# EAGLE board openevse-ac-filter (EAGLE 8.3.1)
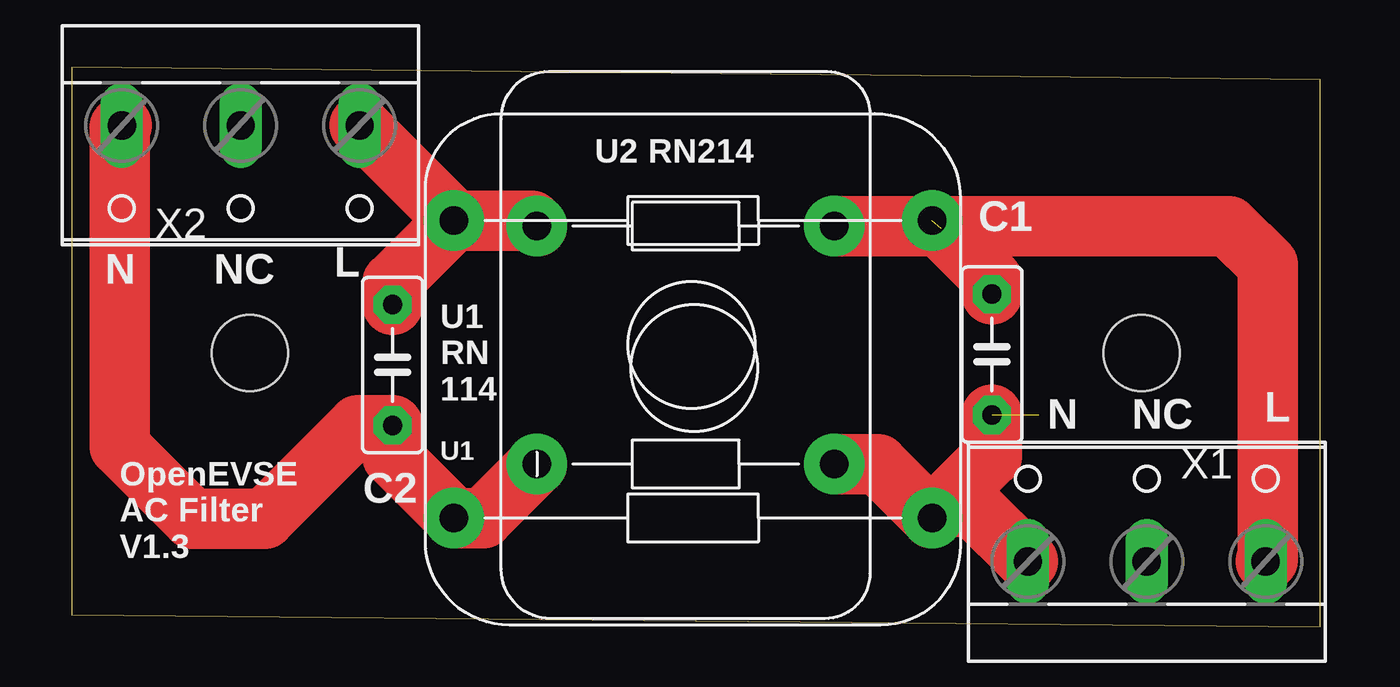
[diagram p0: board, top side]
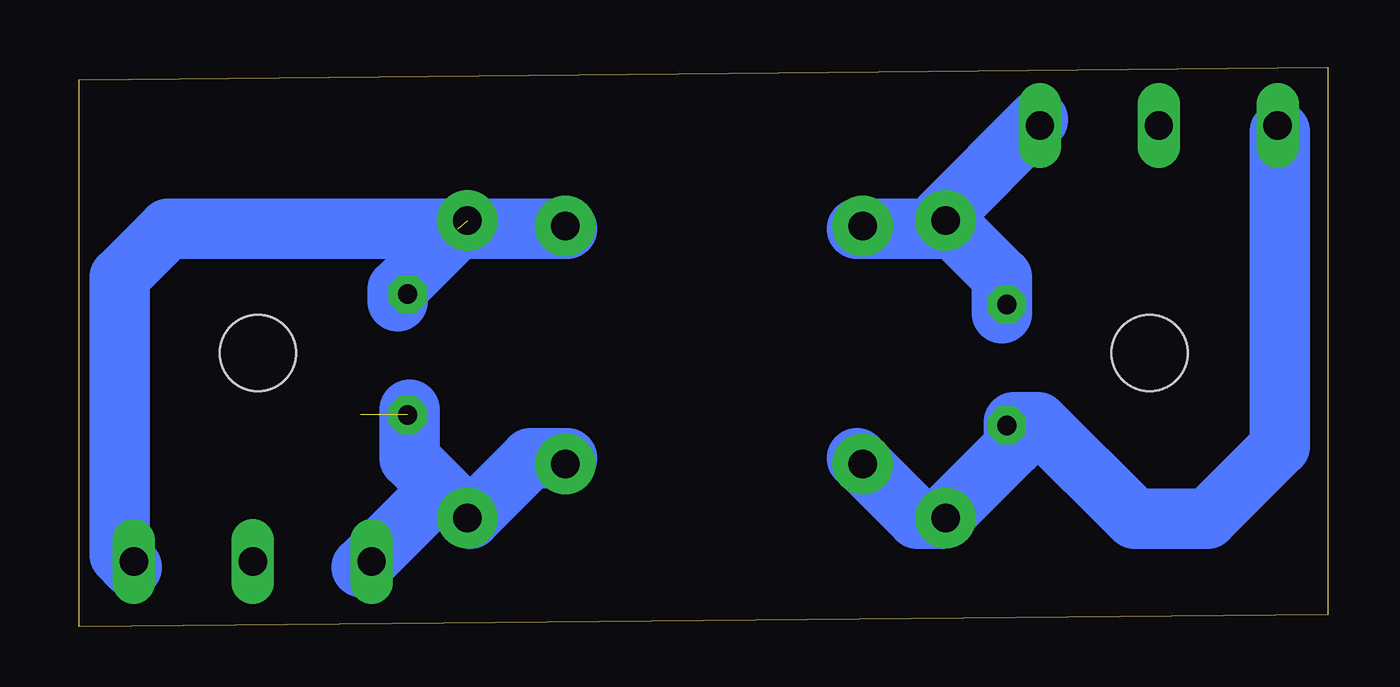
[diagram p1: board, bottom side, seen from below]

Size 52.5 x 23.51 mm. Coordinates in mm from the lower left corner, seen from the top.
Outline: 0,0.51 52.5,0 52.5,23 0,23.51 0,0.51
Copper layers (1*16): Top 0.035mm / dielectric 1.5mm / Bottom 0.035mm
Design rules "default": minimum track width 10mil, minimum drill 24mil, track to track 8mil, track to pad 8mil, pad to pad 8mil, via to via 8mil, smd to smd 8mil, copper to edge 40mil, drill to drill 8mil, minimum pad ring 10mil, minimum via ring 8mil, stop-mask expansion 4mil, vias tented up to drill 0mil, thermal gap 10mil
Holes 3.2 mm at 7.5,11.5 45,11.5

## Footprints (pad centres in the part's own frame; a part is rotated, then mirrored left to right if it is on the bottom)
C5B2.5 = drill 0.813 pad 1.6 octagon: 1 -2.54,0; 2 2.54,0
RN114-0.3-02-47M = drill 1.2 pad 2.54: P$1 9.87,-5.66; P$2 -10.23,-5.66; P$3 9.87,6.84; P$4 -10.23,6.84
RN214-0.3-02-47M = drill 1.2 pad 2.54: P$1 14,6.5; P$2 1.5,6.5; P$3 14,16.5; P$4 1.5,16.5
W237-103 = drill 1.194 long: 1 -5,-1.29; 2 0,-1.29; 3 5,-1.29

## Placement (x,y rotation side)
C1  10F  [C5B2.5]  38.7,11.44 90 top
C2  10nF  [C5B2.5]  13.5,11 90 top
U$1  47mH  [RN114-0.3-02-47M]  25.95,11.41 180 top
U$2  RN214-0.3-02-47M  [RN214-0.3-02-47M]  33.57,23.34 180 top
X1  [W237-103]  45.21,4.03 0 top
X2  [W237-103]  7.11,19.78 180 top

## Library data of the parts
C1 C2 = capacitor-wima
U$1 U$2 = Schaffner-CM-Choke
X1 X2 = con-wago-500; MPN: 237-103; OC_FARNELL: unknown; OC_NEWARK: 18M7116

## Nets
N$1: C1.1 U$1.P$4 U$2.P$4 X1.1
N$2: C1.2 U$1.P$2 U$2.P$2 X1.3
N$3: C2.1 U$1.P$3 U$2.P$3 X2.3
N$4: C2.2 U$1.P$1 U$2.P$1 X2.1

## Tracks (layer width: path | path; a pad name or v marks a point on that pad's centre or on a via)
N$1  (1 unrouted)
  Top 2.54: U$2.P$4 33.91,6.84 U$1.P$4 36.18,4.65 36.58,5.05 | 36.58,5.05 37.91,5.05 X1.1 | C1.1 38.7,7.17 36.58,5.05
N$2  (1 unrouted)
  Top 2.54: U$2.P$2 35.95,16.84 | 35.95,16.84 U$1.P$2 | 35.95,16.84 48.66,16.84 50.29,15.21 50.29,2.82 X1.3 | C1.2 38.7,14.61 36.58,16.73
N$3
  Top 2.54: X2.3 2.03,20.99 2.03,7.59 5.08,4.54 8.13,4.54 12.05,8.46 C2.1 13.5,7.15 U$1.P$3 17.3,4.57 U$2.P$3
N$4
  Top 2.54: U$1.P$1 19.34,17.07 U$2.P$1 | U$1.P$1 16.08,17.1 X2.1 | C2.2 13.5,14.49 U$1.P$1
N$6
  Bottom 2.54: 2.03,20.8 2.03,7.59 5.08,4.54 8.13,4.54 12.19,8.6 13.21,8.6 13.21,7.59 16.26,4.54 17.27,4.54 19.81,7.08
N$9
  Bottom 2.54: 12.19,21.3 16.26,17.24 13.72,14.7 13.72,13.18
N$10
  Bottom 2.54: 19.81,16.73 16.26,16.73 15.75,17.24
N$11
  Bottom 2.54: 32,16.73 36.58,16.73 | 36.58,16.73 48.77,16.73 50.8,14.7 50.8,3.02 50.29,2.51 | 39.12,13.68 39.12,14.19 36.58,16.73
N$12
  Bottom 2.54: 38.61,9.11 38.61,7.08 36.07,4.54 33.53,7.08 32,7.08
N$13
  Bottom 2.54: 40.64,2.51 37.59,5.56

## Text on the board
tPlace: L | N | NC | L | N | NC | OpenEVSE / AC Filter / V1.3
tNames: U2 RN214 | U1 / RN / 114 | U1